# EAGLE board panel (EAGLE 9.2.2)
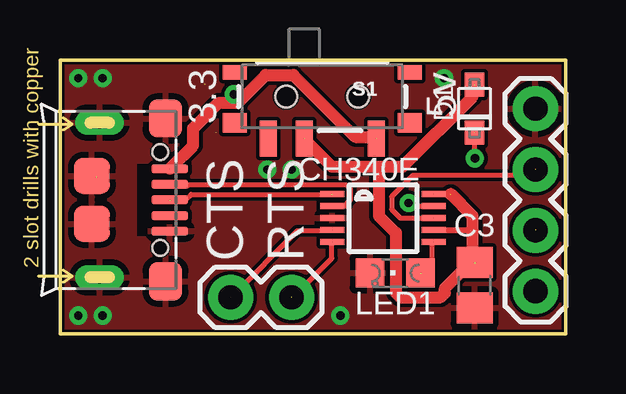
[diagram p0: board, top side]
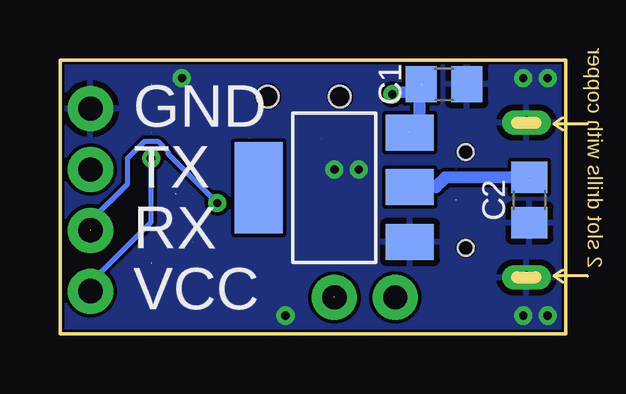
[diagram p1: board, bottom side, seen from below]

Size 21.08 x 11.43 mm. Coordinates in mm from the lower left corner, seen from the top.
Outline: 0,0 21.08,0 21.08,11.43 0,11.43 0,0
Copper layers (1*16): Top 0.035mm / dielectric 1.5mm / Bottom 0.035mm
Design rules "default *": minimum track width 6mil, minimum drill 0.35mm, track to track 6mil, track to pad 6mil, pad to pad 6mil, via to via 6mil, smd to smd 6mil, copper to edge 4mil, drill to drill 6mil, minimum pad ring 10mil, minimum via ring 8mil, stop-mask expansion 4mil, vias tented up to drill 0mil, thermal gap 10mil
Net classes: 0 default: width 0.203 mm; 1 power: width 0.508 mm

## Footprints (pad centres in the part's own frame; a part is rotated, then mirrored left to right if it is on the bottom)
C0805 = smd 1.3 x 1.5: 1 -0.95,0; 2 0.95,0
MSOP10 = smd 1 x 0.25: 1 -2.113,1; 2 -2.113,0.5; 3 -2.113,0; 4 -2.113,-0.5; 5 -2.113,-1; 6 2.113,-1; 7 2.113,-0.5; 8 2.113,0; 9 2.113,0.5; 10 2.113,1
SOD-323F = smd 1 x 0.8: A -1,0; C 1,0
SOT223 = smd 1.499 x 2.007: 1 -2.261,-3.15; 2 0.025,-3.15; 3 2.311,-3.15 | smd 3.81 x 2.007: 4 0,3.15
1X04 = drill 1.016 pad 1.88: 1 0,0; 2 2.54,0; 3 5.08,0; 4 7.62,0
1X02 = drill 1.016 pad 1.88: 1 0,0; 2 2.54,0
CHIPLED_0805 = smd 1.2 x 1.2: A 0,-1.05; C 0,1.05
SWITCH_SPST_SMD_A = smd 0.7 x 1.5: 1 -2.25,-1.75; 2 -0.75,-1.75; 3 2.25,-1.75 | smd 1 x 0.6: GND1 -3.65,1; GND3 3.65,1 | smd 1 x 0.8: GND2 -3.65,-1.1; GND4 3.65,-1.1 | hole 0.9: -1.5,0; 1.5,0
MICRO-USB5+4P-SMD-0.65-B = smd 0.381 x 1.524: 1 -1.3,-0.25; 2 -0.65,-0.25; 3 0,-0.25; 4 0.65,-0.25; 5 1.3,-0.25 | smd 1.6 x 1.397: S1 -3.4,-0.427; S6 3.4,-0.427 | drill 0.508 pad 1.016 long: S2 -3.226,-3.175; S5 3.226,-3.175 | smd 1.5 x 1.5: S3 -1,-3.5; S4 1,-3.5 | hole 0.635: -2,-0.65; 2,-0.65

## Placement (x,y rotation side)
C1  100nF  [C0805]  5.08,10.41 0 bottom
C2  100nF  [C0805]  1.52,5.59 270 bottom
C3  100nF  [C0805]  17.27,2.03 270 top
CH340E  CH340ESMD  [MSOP10]  13.46,4.83 0 top
D1  [SOD-323F]  17.27,9.4 270 top
IC1  REG1117  [SOT223]  9.65,6.1 90 bottom
J1  [1X04]  19.81,1.78 90 top
J2  [1X02]  9.65,1.52 180 top
LED1  [CHIPLED_0805]  13.97,2.54 90 top
S1  [SWITCH_SPST_SMD_A]  10.92,9.91 0 top
USB2  ST-USB-001G  [MICRO-USB5+4P-SMD-0.65-B]  4.83,5.59 270 top

## Library data of the parts
C1-C3 = rcl-2
CH340E = CH340E
D1 LED1 = adafruit
IC1 = burr-brown-3
J1 = SparkFun-Connectors; PROD_ID: CONN-09696
J2 = SparkFun-Connectors
S1 = SparkFun-Switches; PROD_ID: SWCH-10651; SF_SKU: COM-10860
USB2 = Seeed-Connector; MPN: ST-USB-001G

## Nets
3.3V [power]: S1.1
3V3 [power]: C2.1 IC1.2
5V [power]: C1.1 IC1.3 S1.3 USB2.1
CTS: CH340E.5 J2.1
GND [power]: C1.2 C2.2 C3.2 CH340E.3 IC1.1 J1.4 LED1.C USB2.5 USB2.S1 USB2.S2 USB2.S3 USB2.S4 USB2.S5 USB2.S6
N$1: CH340E.6 LED1.A
RTS: CH340E.4 J2.2
RX: CH340E.9 J1.2
TX: CH340E.8 J1.3
USBN: CH340E.2 USB2.2
USBP: CH340E.1 USB2.3
VCC [power]: C3.1 CH340E.7 CH340E.10 D1.A S1.2
VCC_D: D1.C J1.1

## Tracks (layer width: path | path; a pad name or v marks a point on that pad's centre or on a via)
3V3  (1 unrouted)
  Bottom 0.508: C2.1 1.55,6.53 5.02,6.53 5.42,6.12 IC1.2
5V  (via drill 0.35)  (5 unrouted)
  Top 0.508: 7.51,9.73 7.42,9.64 6.62,9.64 5.55,8.57 5.55,7.86 4.66,6.97 USB2.1 | 7.51,9.73 8.57,10.79 9.73,10.79 12.31,8.22 13.11,8.22 S1.3 | v7.24,9.99 7.51,9.73
  Bottom 0.508: C1.1 6.08,10.35 6.08,8.84 6.44,8.48 IC1.3 | v7.24,9.99 7.15,10.08 6.29,10.11 6,10.39
CTS  (2 unrouted)
  Top 0.203: CH340E.5 11.33,3.77 11.33,3.15 9.73,1.54 9.65,1.54
GND  (via drill 0.35)
  other vias: 0.76,10.67 1.78,10.67 0.76,0.76 1.78,0.76 8.64,6.86 9.65,6.86 16,10.67 11.68,0.76
  pour Top: 0,0 0,11.43 21.08,11.43 21.08,0
  pour Bottom: 0,0 0,11.43 21.08,11.43 21.08,0
N$1  (2 unrouted)
  Top 0.203: CH340E.6 15.51,3.77 15.51,2.94 15.04,2.52
RTS  (2 unrouted)
  Top 0.203: CH340E.4 11.33,4.3 9.91,4.3 7.15,1.55 J2.2
RX  (via drill 0.35)  (1 unrouted)
  Top 0.203: v14.53,5.46 14.66,5.33 CH340E.9
  Bottom 0.203: v14.53,5.46 16.57,7.51 16.57,7.59 17.02,8.04 17.55,8.04 18.26,7.33 18.26,6.26 19.77,4.75 19.76,4.38 19.82,4.33
TX  (2 unrouted)
  Top 0.203: J1.3 19.77,6.8 19.6,6.62 14.71,6.62 13.82,5.73 13.82,5.19 14.19,4.83 CH340E.8
USBN
  Top 0.203: CH340E.2 11.93,5.33 11.94,5.33 11.94,5.43 12.1,5.6 12.1,6.06 11.95,6.21 5.35,6.21 5.3,6.16 4.66,6.16 USB2.2
USBP  (2 unrouted)
  Top 0.203: CH340E.1 11.33,5.81 5.46,5.82 5.28,5.64 4.66,5.64 4.58,5.58
VCC  (6 unrouted)
  Top 0.254: CH340E.7 17.19,4.33 | CH340E.10 16.24,5.83
  Top 0.508: 17.2,4.32 17.2,3.06 C3.1 | 17.2,4.32 17.2,4.93 16.3,5.83 16.27,5.83 | 13.28,6.97 11.33,6.97 10.17,8.13 S1.2 | 13.28,6.97 14.26,6.97 17.2,9.91 17.2,10.34 D1.A | 13.28,6.97 13.28,4.93 13.99,4.22 13.99,1.7 14.17,1.52 15.86,1.52 16.04,1.7 16.04,1.91 17.02,2.88 17.27,2.93 | 17.19,4.33 17.2,4.32
VCC_D  (via drill 0.35)  (1 unrouted)
  Top 0.203: v17.29,7.33 17.29,8.39 D1.C
  Bottom 0.203: v17.29,7.33 17.29,4.66 19.77,2.17 19.77,1.82 J1.1

## Text on the board
tPlace: 3.3 | 5v | CTS | RTS
bPlace: GND | TX | RX | VCC
_tNames: S1 | D1 | CH340E | C3 | LED1
_bNames: C1 | C2